# Altium PCB 06002480宁波2号线二期车载PIS系统_功率放大器音频板2 BHC-A-2030-05_PCB V1.0.PcbDoc (part 2 of 6)
Units mil, origin at the board's own origin, x right, y up, seen from the top; angles counter-clockwise.
Board outline 3385.83 x 3779.53 mil, 4 copper layers (Top Layer, GND, VDD, Bottom Layer); 210 components, 185 nets, 792 pads, 313 vias.
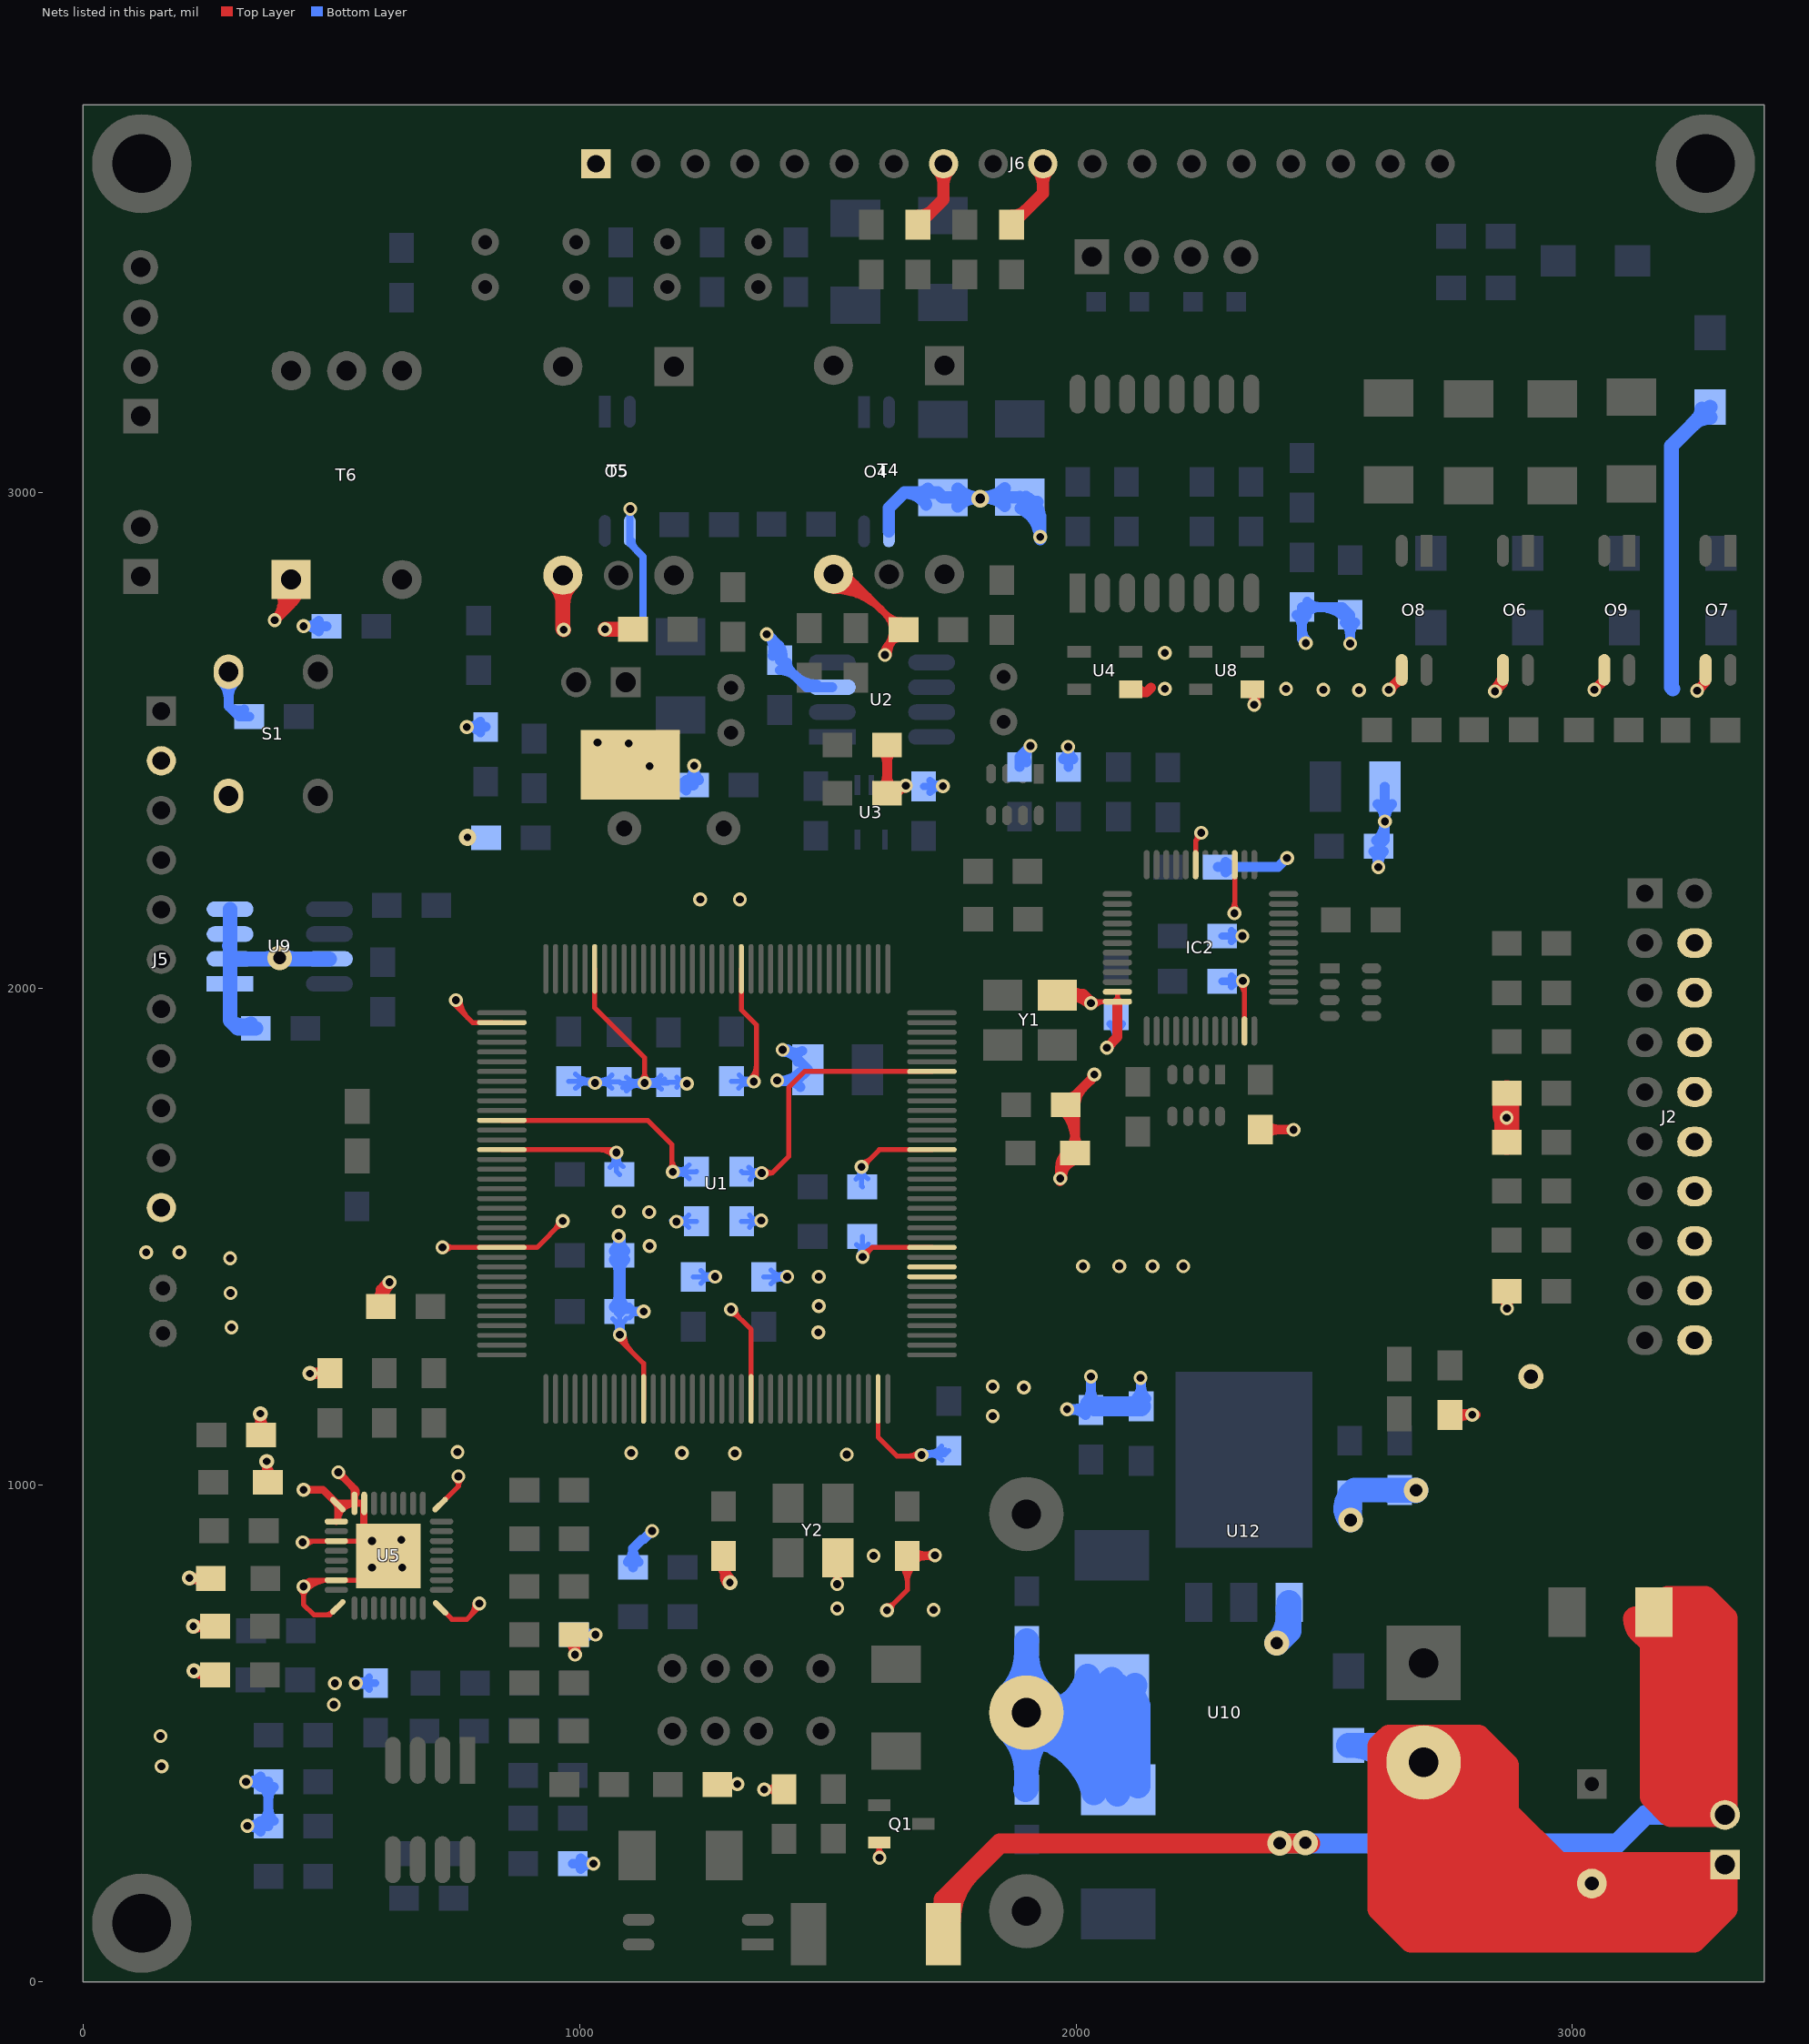
[diagram p4: the nets of this part, all layers, seen from the top]

## Via types
v1: diameter 28, hole 16, Top Layer to Bottom Layer, 240 vias
v2: diameter 30, hole 15, Top Layer to Bottom Layer, 25 vias
v3: diameter 35, hole 15, Top Layer to Bottom Layer, 16 vias
v4: diameter 30, hole 18, Top Layer to Bottom Layer, 10 vias
v5: diameter 40, hole 20, Top Layer to Bottom Layer, 9 vias
v6: diameter 50, hole 25, Top Layer to Bottom Layer, 7 vias
v7: diameter 50, hole 28, Top Layer to Bottom Layer, 5 vias
v8: diameter 36, hole 20, Top Layer to Bottom Layer, 1 vias

## Nets (pads, with @x,y where several pads share a name; then routed paths per layer and width w, separated by ;. In a path a pad name is that pad's centre, name@x,y a point inside that pad or via, vN(x,y) a via of type N, cw(c..) or ccw(c..) an arc to the next point about the centre after c; other vN are vias at no path point) (continued)
AGND1: C1.1 C3.1 C5.2 C7.2 C8.1 C9.2 C11.1 C13.1 C15.2 C16.1 C17.1 C18.1 C20.1 C21.2 C22.1 C23.1 C24.1 C26.1 C27.2 C29.2 C30.2 C31.1 C34.1 C35.2 C36.1 C37.1 C38.2 C39.1 C40.1 C41.1 C42.1 C43.1 C44.1 C45.2 C46.1 C47.1 C48.1 C49.1 C50.1 C51.1 C52.1 C53.1 C56.2 C57.1 C58.1 C62.1 C63.2 C65.2 C66.2 C67.1 C68.2 C69.1 C70.2 C71.2 C72.2 C73.1 C74.2 C77.2 C80.2 C81.1 D10.A D13.A IC2.15 IC2.19 IC2.35 IC2.36 IC2.47 J2.4 J2.6 J2.8 J2.10 J2.12 J2.14 J2.16 J2.18 J2.20 J5.2 J5.11 J6.1 J6.8 J6.10 O4.3 O5.3 O6.3 O7.3 O8.3 O9.3 pad.0 Q1.2 R1.1 R9.2 R24.2 R29.1 R30.1 R31.1 R35.2 R40.2 R42.2 R50.1 R67.2 R76.1 R97.1 R105.1 S1.1 T4.5 T5.5 T6.1 U1.16 U1.31 U1.38 U1.51 U1.61 U1.83 U1.94 U1.107 U1.120 U1.130 U2.3 U3.3 U4.1 U5.1 U5.3 U5.7 U5.31 U5.32 U5.33 U5.34 U5.35 U5.36 U5.37 U8.1 U9.1 U9.2 U9.3 U9.4 U9.7 U10.4 U12.1 Y1.2 Y2.2 | length 26944.8
  Top Layer w10: v1@437.64,789.64 cw(c422.27,774.27) 444,774.27 cw(c465.73,774.27) 450.36,789.64 cw(c496.84,743.16) U5.7@496.84,808.89 ; v1(442,885) 444.63,887.63 U5.3@510,887.63 584.88,887.63 U5.33@614.51,858 U5.33@565.4,808.89 ; v1@443.29,796.71 cw(c472.7,767.3) 472.7,808.89 ; v1@444.89,804.96 ccw(c446.23,818.54) 455.89,808.89 ; v1@448.36,878.64 cw(c470.08,856.92) 470.08,887.63 ; v1@448.36,891.36 ccw(c457.38,900.38) 457.38,887.63 ; v1@452.77,798.02 cw(c464.14,800.64) 455.89,808.89 ; 485.98,739 ccw(c485.98,762.53) U5.37@502.62,745.89 ; U5.37@513,755 497,739 465,739 444,760 v1(444,796) 444,797 455.89,808.89 ; U5.33@573.11,832.6 cw(c545.98,828.31) U5.33@565.4,808.89 ; U5.33@575.64,881.27 ccw(c560.27,865.9) 560.27,887.63 ccw(c560.27,909.36) U5.33@575.64,893.99 ; U5.33@582,843 ccw(c582,885.28) U5.33@611.89,855.38 ; U5.33@582,878.63 cw(c582,849.94) U5.33@602.28,870.23 ; U5.33@591,887.63 ccw(c605.77,887.63) U5.33@595.33,877.19 ; U5.35@719,961 756,998 ; U5.34@720,753 743,730 773,730 798,755 v1(798,762) ; v1(724,1479) U1.61@843.44,1478.98 913.98,1478.98 966,1531 v1(966,1532) ; v1@730.36,1472.64 cw(c745.67,1457.33) 745.67,1478.98 ; v1@730.36,1485.36 ccw(c745.79,1500.79) 745.79,1478.98 ; v1@750,1977 ccw(c776.56,1977) 757.78,1958.22 ; v1@750.03,1011.26 cw(c738.28,998) 756,998 ; v1(751,1977) 751,1965 784.27,1931.73 U1.38@843.44,1931.73 ; v1(756,1018) 756,998 ; v1@760,1977 ccw(c810.7,1977) 774.85,1941.15 ; v1@761.97,1011.26 ccw(c773.72,998) 756,998 ; 777.69,734.69 ccw(c750.37,762) v1@789,762 ; U1.51@843.44,1675.83 1069.17,1675.83 1074,1671 v1(1074,1670) ; 949.93,1514.93 ccw(c932.86,1532) v1@957,1532 ; 952.34,1517.34 cw(c966,1503.69) v1@966,1523 ; U1.31@1030.45,2040 1030.45,1961.55 1131,1861 v1(1131,1810) ; 1038.21,1675.83 cw(c1038.21,1634.21) v1@1067.64,1663.64 ; v1@1080,1303 ccw(c1101.73,1303) 1086.36,1287.64 ; v1(1081,1303) 1081,1293 1128.87,1245.13 U1.83@1128.87,1173.86 ; v1@1090,1303 ccw(c1135.87,1303) 1103.44,1270.56 ; v1@1124.64,1816.36 ccw(c1109.27,1831.73) 1131,1831.73 ccw(c1152.73,1831.73) v1@1137.36,1816.36 ; R50.1@1277.68,397.37 v1@1320.37,397.37 ; R50.1@1294.75,397.37 ccw(c1294.75,421.25) v1@1311.64,404.36 ; R50.1@1297.79,397.37 cw(c1297.79,377.79) v1@1311.64,391.64 ; R50.1@1299.24,386.16 cw(c1320.37,371.85) v1@1320.37,397.37 ; R50.1@1299.24,408.58 ccw(c1320.37,422.89) v1@1320.37,397.37 ; v1@1305,1345 cw(c1305,1323.27) 1320.36,1338.64 cw(c1335.73,1354) v1@1314,1354 ; v1(1305,1354) 1345.41,1313.59 U1.94@1345.41,1173.86 ; v1(1318,398) 1321,398 v1@1320.37,397.37 ; U1.16@1325.72,2040 1325.72,1957.28 1356,1927 1356,1818 v1(1351,1813) ; v1@1344.64,1819.36 ccw(c1317.2,1846.8) 1356,1846.8 ; v1(1372,387) v1@1372.68,387.68 ; v1@1377.87,393.82 ccw(c1384.73,401.77) 1387.44,391.63 ccw(c1389.89,382.51) v1@1380.73,384.81 ; v1@1378.36,380.64 cw(c1395.36,363.64) R97.1@1395.36,387.68 ; v1@1378.36,393.36 ccw(c1392.1,407.1) R97.1@1392.1,387.68 ; R97.1@1395.38,376.02 ccw(c1372.68,359.75) v1@1372.68,387.68 ; R97.1@1395.38,399.33 cw(c1372.68,415.61) v1@1372.68,387.68 ; R97.1@1411.63,387.68 v1@1372.68,387.68 ; Y2.2@1507.55,822.74 cw(c1496.51,802) v1@1520,802 ; v1@1512.64,807.36 ccw(c1494.86,825.14) Y2.2@1520,825.14 ; v1(1519,801) v1@1520,802 ; Y2.2@1520,820.31 ccw(c1538.31,820.31) v1@1525.36,807.36 ; Y2.2@1520,854 v1@1520,802 ; Y2.2@1532.45,822.74 ccw(c1543.49,802) v1@1520,802 ; v1(1568,1641) 1569,1641 1603.83,1675.83 U1.130@1709.58,1675.83 ; v1@1568,1650 ccw(c1568,1674.14) 1585.07,1657.07 ; v1(1570,1460) 1588.98,1478.98 U1.120@1709.58,1478.98 ; v1@1570,1469 ccw(c1570,1490.73) 1585.36,1475.36 ccw(c1600.73,1460) v1@1579,1460 ; v1@1577,1641 cw(c1596.31,1641) 1582.66,1654.66 ; v1@1597.64,256.36 ccw(c1582.98,271.02) Q1.2@1603.71,271.02 ; Q1.2@1598.89,275.78 cw(c1587.27,264.16) 1603.71,264.16 cw(c1620.15,264.16) Q1.2@1608.52,275.78 ; U1.107@1601.32,1173.86 1601.32,1096.68 1639,1059 1687,1059 v1(1689,1061) ; Q1.2@1603.71,272.43 ccw(c1626.43,272.43) v1@1610.36,256.36 ; Q1.2@1603.71,280.6 1603.71,242.71 1604,243 v1(1604,250) ; v1(1619,748) 1660.05,789.05 C36.1@1660.05,857.64 1715.36,857.64 1716,857 v1(1716,859) ; v1@1619,757 ccw(c1619,778.73) 1634.36,763.36 ccw(c1649.73,748) v1@1628,748 ; C36.1@1645.91,838.5 cw(c1611.76,804.35) 1660.05,804.35 cw(c1708.33,804.35) C36.1@1674.19,838.5 ; 1662.44,1059 ccw(c1662.44,1087.56) v1@1682.64,1067.36 ; 1672.1,1059 cw(c1672.1,1044.1) v1@1682.64,1054.64 ; C36.1@1674.19,843.5 cw(c1708.33,809.35) 1708.33,857.64 cw(c1708.33,905.92) C36.1@1674.19,871.78 ; 1689.71,862.63 ccw(c1696.27,887.1) v1@1710.83,866.37 ; 1690.99,857.64 ccw(c1690.99,884.01) v1@1709.64,865.36 ; 1693.28,853.6 cw(c1699.49,830.41) v1@1711.5,851.21 ; 1696.4,854.44 ccw(c1691.37,873.22) v1@1708.21,863.5 ; 1697.56,857.64 cw(c1697.56,840.56) v1@1709.64,852.64 ; 1701.85,859.37 cw(c1699.15,849.27) v1@1708.21,854.5 ; v1(2030,1971) 2033,1974 IC2.36@2083.36,1974 IC2.35@2083.36,1993.68 ; v1@2036.36,1964.64 cw(c2058.97,1942.03) IC2.36@2058.97,1974 ; v1@2036.36,1977.36 ccw(c2044.49,1985.49) 2044.49,1974 ; IC2.19@2240.84,2249.59 2240.84,2297.84 ; v1@2243.59,2310.78 cw(c2232.24,2306.44) 2240.84,2297.84 ; v1(2252,2314) 2251,2313 2251,2308 2240.84,2297.84 ; v1@2312.64,2158.36 ccw(c2295.88,2175.12) 2319.58,2175.12 ; v1(2319,2152) 2320,2153 2320,2155 2319.58,2155.43 IC2.15@2319.58,2249.59 ; 2319.58,2172.34 ccw(c2339.34,2172.34) v1@2325.36,2158.36 ; v1@2329.64,2009.64 cw(c2306.4,1986.4) 2339.26,1986.4 ; v1(2336,2016) 2339.26,2012.74 IC2.47@2339.26,1914.95 ; 2339.26,2002.14 cw(c2349.86,2002.14) v1@2342.36,2009.64 ; 455.89,808.89 U5.7@510,808.89 U5.33@565.4,808.89
  Top Layer w15: v2(214,813) v2@214,812 ; v2@217.75,806.5 cw(c225.16,793.68) C68.2@228.99,807.98 ; v2@219.3,807.7 cw(c229.69,797.31) C68.2@229.69,812 ; v2@219.3,818.3 ccw(c234.52,833.52) C68.2@234.52,812 ; v2@220.72,816.34 ccw(c236.4,824.13) C68.2@231.87,807.21 ; v2(223,626) 225,626 v2@233,618 ; v2@225.79,709.53 cw(c234.75,694.19) 239.35,711.35 cw(c243.95,728.51) v2@228.52,719.71 ; v2@225.79,722.47 ccw(c234.75,737.81) 239.35,720.65 ccw(c243.95,703.49) v2@228.52,712.29 ; v2@227.3,710.7 cw(c240.11,697.89) 240.11,716 cw(c240.11,734.11) v2@227.3,721.3 ; v2@228.3,631.3 ccw(c260.42,663.42) C81.1@260.42,618 ; C68.2@238.7,800.62 ccw(c214,779.5) v2@214,812 ; C68.2@238.7,823.38 cw(c214,844.5) v2@214,812 ; C81.1@245.27,610.33 ccw(c233,604.35) v2@233,618 ; C81.1@245.27,625.67 cw(c233,631.65) v2@233,618 ; C73.1@247.93,704.37 ccw(c222,681.3) v2(222,716) ; C73.1@247.93,727.63 cw(c222,750.7) v2(222,716) ; C68.2@257,812 v2@214,812 ; C81.1@266,618 v2@233,618 ; C73.1@266,716 v2(222,716) ; C69.1@345.99,1113.42 ccw(c316.11,1143.3) 358.36,1143.3 ccw(c400.61,1143.3) C69.1@370.74,1113.42 ; v2@350.8,1139.77 cw(c335.64,1129.43) C69.1@353.37,1124.68 ; v2@351.7,1138.7 cw(c335.61,1122.61) C69.1@358.36,1122.61 ; v2@353.25,1137.5 cw(c342.26,1118.47) C69.1@363.49,1124.16 ; v2(357,1144) 359,1144 358.36,1143.36 C69.1@358.36,1101.05 ; C77.2@360.12,1018.85 ccw(c335.04,1046) v2@372,1046 ; 362.07,1129.45 cw(c375.83,1133.13) v2@363.5,1140.25 ; v2@364.7,1042.7 cw(c347.07,1025.07) C77.2@372,1025.07 ; v2@364.96,1042.44 cw(c357.68,1034.42) 368.15,1031.62 ; v2@366.25,1041.5 cw(c354.78,1021.64) C77.2@376.94,1027.58 ; v2(370,1048) v2@372,1046 ; C77.2@372,1006 v2@372,1046 ; C77.2@383.88,1018.85 cw(c408.96,1046) v2@372,1046 ; v1(444,991) 483,991 U5.36@513,961 ; v1@448.6,986.4 cw(c459.69,975.31) 459.69,991 cw(c459.69,1006.69) v1@448.6,995.6 ; v2(457,1225) v2@457.64,1225.64 ; v2@460.75,1231.5 ccw(c469.03,1245.84) C5.2@473.32,1229.84 ; v2@461.36,1218.9 cw(c470.2,1206.54) C5.2@474.14,1221.22 ; v2@462.3,1219.7 cw(c476.65,1205.35) C5.2@476.65,1225.64 ; v2@462.3,1230.3 ccw(c473.56,1241.56) C5.2@473.56,1225.64 ; v2@463.5,1221.25 cw(c480.51,1211.43) C5.2@475.42,1230.4 ; v2@463.5,1228.75 ccw(c476.86,1236.47) C5.2@472.87,1221.56 ; C5.2@484.06,1213.9 ccw(c457.64,1190.02) v2@457.64,1225.64 ; C5.2@484.06,1237.37 cw(c457.64,1261.26) v2@457.64,1225.64 ; C5.2@497.05,1225.64 v2@457.64,1225.64 ; U5.1@510,927.82 513,930.82 U5.36@513,961 ; U5.36@510.32,962.26 cw(c513.24,959.68) U5.36@513.24,963.57 ; U5.1@513,931.58 cw(c542.42,931.58) U5.36@521.62,952.38 ; v1@514,1019.5 cw(c514,1003.81) 525.1,1014.9 cw(c536.19,1026) v1@520.5,1026 ; v1(514,1026) 546.57,993.43 ; U5.36@521.55,952.31 cw(c546.57,930.14) U5.32@546.57,963.57 ; 540.49,999.51 cw(c522.17,981.2) U5.32@548.07,981.2 ; U5.32@547.82,980.35 ccw(c539.29,986.14) 546.57,993.43 ; U5.33@568.87,903.65 cw(c552.85,887.63) U5.33@575.5,887.63 ; U5.33@584.88,887.63 565.44,907.07 565.44,963.57 U5.32@546.57,963.57 ; C34.1@1279.33,838.8 cw(c1262.42,816.95) 1290.05,816.95 ; C34.1@1285.94,832.28 ccw(c1315.93,840.31) v2@1305.52,811.07 ; 1290.05,817.16 ccw(c1316.16,817.16) v2@1297.7,798.7 ; C34.1@1290.05,853.38 ccw(c1352.38,853.38) v2@1308.3,809.3 ; C34.1@1290.05,857.64 1290.05,816.95 ; v2@1295.5,804 ccw(c1277.39,804) 1290.2,816.8 ccw(c1303,829.61) v2@1303,811.5 ; C34.1@1300.76,838.8 ccw(c1317.68,816.95) 1290.05,816.95 ; v2(1303,804) 1290.05,816.95 ; T4.5@1511.38,2802.66 cw(c1511.38,2665.13) 1608.62,2762.38 ; T4.5@1511.38,2817.66 cw(c1511.38,2716.35) 1583.02,2787.98 ; T4.5@1511.38,2832.66 cw(c1511.38,2767.56) 1557.41,2813.59 ; T4.5@1511.38,2834.53 1536.47,2834.53 1648.05,2722.95 C3.1@1651.05,2722.95 ; v1@1611.3,2677.34 ccw(c1605.09,2686.31) 1616,2686.31 ; v1(1615,2672) 1616,2672 1616,2686.31 ; 1617.48,2753.52 cw(c1586.9,2722.95) C3.1@1630.14,2722.95 ; 1618.46,2752.54 ccw(c1647.64,2781.72) C3.1@1647.64,2740.45 ; R9.2@1619.32,2393.63 1641.63,2393.63 v1(1657,2409) cw(c1645.14,2420.86) R9.2@1634.95,2407.53 ; v1@1621.5,2672 cw(c1669.34,2672) C3.1@1635.51,2705.82 ; 1626.3,2696.61 cw(c1647.64,2675.28) C3.1@1647.64,2705.45 ; C3.1@1630.15,2722.32 cw(c1581.77,2720.55) 1616,2686.32 ; v1@1650.5,2409 cw(c1634.81,2409) 1645.9,2397.9 cw(c1657,2386.81) v1@1657,2402.5 ; C3.1@1652.64,2722.95 1616,2686.31 ; U5.36@513,961 515.57,963.57 U5.32@546.57,963.57 ; U5.32@546.57,963.57 546.57,993.43
  Top Layer w20: T6.1@393.94,2808.69 cw(c347.62,2780.38) v1(386,2742) 419,2775 ; 403.96,2759.96 ccw(c369.92,2794.01) T6.1@411,2819.11 ; T6.1@405.16,2798.1 cw(c392.81,2775) 419,2775 ; T6.1@419,2824 419,2775 ; 421.93,2777.93 ccw(c392.22,2807.64) T6.1@428.07,2829.54 ; T6.1@432.84,2798.1 ccw(c445.19,2775) 419,2775 ; C37.1@589.37,1370.88 ccw(c567.04,1394.64) 599.64,1394.64 ; C37.1@599.64,1357.43 cw(c668.57,1357.43) v1@619.83,1406.17 ; C37.1@599.64,1359.95 599.64,1394.64 ; 599.64,1386.47 cw(c618.2,1386.47) v1@617.21,1405.01 ; 605.05,1400.05 cw(c617,1388.1) v1@617,1405 ; C37.1@609.91,1370.88 cw(c632.24,1394.64) 599.64,1394.64 ; v1(617,1409) 614,1409 599.64,1394.64 ; C65.2@978.07,688.57 cw(c952.46,662.96) 988.68,662.96 cw(c1024.89,662.96) C65.2@999.28,688.57 ; C65.2@988.68,674.26 ccw(c1006.26,674.26) v1@993.83,661.83 ; C65.2@988.68,699.18 988.68,660.68 988,660 989,659 v1(991,659) ; C65.2@992.06,675.6 ccw(c1009.38,670.96) v1@994.35,661.18 ; R9.2@1608.72,2404.24 ccw(c1583.11,2429.84) 1619.32,2429.84 ccw(c1655.54,2429.84) R9.2@1629.93,2404.24 ; R24.2@1608.72,2480.02 cw(c1583.11,2454.42) 1619.32,2454.42 cw(c1655.54,2454.42) R24.2@1629.93,2480.02 ; R9.2@1619.32,2393.63 R24.2@1619.32,2490.63 ; v1@1968,1612.2 cw(c2013.32,1612.2) C7.2@1998.05,1654.88 ; v1(1968,1618) 1968,1639 ; 1968,1640.6 cw(c2003.16,1640.6) C7.2@1991.32,1673.71 ; v1@1972,1618 cw(c2032.36,1618) C7.2@1989.68,1660.68 ; C8.1@1973.75,1755.44 cw(c1915.22,1696.91) 1998,1696.91 ; C7.2@1975.93,1646.93 cw(c1993,1629.86) C7.2@1993,1654 ; C7.2@1978.08,1667.44 cw(c1943.21,1663.8) 1968,1639 ; C8.1@1984.36,1781.05 ccw(c1984.36,1805.19) C8.1@2001.43,1788.12 ; C7.2@1987.39,1679.61 ccw(c1961.79,1705.21) 1998,1705.21 ccw(c2034.21,1705.21) C7.2@2008.61,1679.61 ; C8.1@1999.36,1766.05 cw(c2047.65,1766.05) 2013.5,1800.19 ; 2027.83,1814.51 ccw(c2015.34,1827) v1@2033,1827 ; v1(2037,1827) 2037,1823.69 C8.1@1979.36,1766.05 1998,1747.41 C7.2@1998,1669 1968,1639 ; v1(2062,1881) 2083.36,1902.36 IC2.36@2083.36,1974 ; U4.1@2110,2603 2116,2597 2142,2597 ; U4.1@2122.26,2607.38 ccw(c2142,2620.96) 2142,2597 ; 2151,2606 2142,2597 ; U8.1@2355,2603 2359,2599 v1(2359,2572) ; v1@2359,2579.77 cw(c2384.14,2579.77) U8.1@2366.36,2597.54 ; U8.1@2360.81,2586.54 ccw(c2376.77,2582.26) v1@2362.46,2574 ; C9.2@2370.95,1716.36 2439.64,1716.36 2440,1716 v1(2438,1716) ; C9.2@2381.56,1705.75 cw(c2407.17,1680.15) 2407.17,1716.36 cw(c2407.17,1752.57) C9.2@2381.56,1726.97 ; v1(2630,2602) 2656,2628 O8.3@2656,2642 ; v1@2633.86,2600.96 cw(c2658.09,2594.47) O8.3@2645.55,2616.19 ; v1@2633.9,2601.12 cw(c2655.86,2596.15) 2644.6,2615.65 ; 2642.34,2614.34 cw(c2656,2600.69) O8.3@2656,2620 ; R1.1@2753.37,1141.32 2804.32,1141.32 2805,1142 v1(2798,1142) ; R1.1@2763.98,1130.72 cw(c2789.58,1105.11) 2789.58,1141.32 cw(c2789.58,1177.54) R1.1@2763.98,1151.93 ; 2781.34,1143.53 ccw(c2786.34,1162.2) v1@2796,1145.46 ; v1@2841.42,2602.06 ccw(c2807.78,2642) O6.3@2860,2642 2860,2615 v1(2844,2599) ; v1@2842.96,2602.86 ccw(c2838,2621.41) O6.3@2854.62,2611.81 ; v1@2851.64,2606.64 ccw(c2836.27,2622) O6.3@2858,2622 ; R31.1@2857.07,1380.02 cw(c2831.46,1354.42) 2867.68,1354.42 cw(c2903.89,1354.42) 2878.28,1380.02 ccw(c2903.11,1355.2) v1@2868,1355.2 ; R31.1@2857.15,1379.95 cw(c2831.56,1354) v1@2868,1354 ; R31.1@2857.59,1379.53 cw(c2836.21,1356) v1(2868,1356) ; R31.1@2867.68,1390.63 2867.68,1354.32 v1@2868,1354 ; R31.1@2878.11,1379.85 ccw(c2901.19,1356) v1(2868,1356) ; v1(3044,2602) 3064,2622 O9.3@3064,2642 ; v1@3249.96,2603.86 ccw(c3244.21,2625.32) O7.3@3263.45,2614.22 ; v1@3250.42,2603.96 ccw(c3248.08,2619.99) O7.3@3262.11,2611.89 ; v1(3251,2600) 3268,2617 O7.3@3268,2642 ; 3261.05,2610.05 ccw(c3249.1,2622) O7.3@3266,2622 ; v1@2868,1354 v1(2868,1356)
  Top Layer w25: C26.1@1681.74,3538.36 1733.07,3589.69 J6.8@1733.07,3661.41 ; C26.1@1681.74,3555.86 ccw(c1681.74,3598.11) 1711.61,3568.24 ; J6.8@1721.03,3649.37 cw(c1691.96,3620.3) 1733.07,3620.3 cw(c1774.18,3620.3) J6.8@1745.11,3649.37 ; C23.1@1869.95,3538.36 1933.07,3601.48 J6.10@1933.07,3661.41 ; C23.1@1869.95,3555.86 ccw(c1869.95,3598.11) 1899.83,3568.24 ; J6.10@1921.03,3649.37 cw(c1891.96,3620.3) 1933.07,3620.3 cw(c1974.18,3620.3) J6.10@1945.11,3649.37 ; Y1.2@1962,1987 2014,1987 ; Y1.2@1983.67,1973.94 cw(c2014,1945.25) 2014,1987 ; Y1.2@1983.67,2000.06 ccw(c2014,2028.75) 2014,1987 ; Y1.2@1987.75,1987 cw(c1987.75,1928.75) v1@2028.94,1969.94 ; v1(2030,1971) 2014,1987
  Top Layer w30: T5.5@949.15,2815.3 cw(c907.54,2773.69) 966.38,2773.69 cw(c1025.21,2773.69) T5.5@983.61,2815.3 ; T5.5@966.38,2832.53 966.38,2724.62 v1(968,2723) ; v1(1051.34,2723.95) C13.1@1107.64,2723.95 ; C3.1@1651.05,2722.95 C3.1@1652.64,2722.95
  Top Layer w50: v1@2864,1744 2864,1787 2867.68,1790.68 R29.1@2867.68,1789.63 R30.1@2867.68,1690.77
  Bottom Layer w10: C40.1@977.95,1813.64 1028.36,1813.64 1032,1810 v1@1034.64,1812.64 ; C40.1@992.09,1799.5 cw(c1026.24,1765.35) 1026.24,1813.64 cw(c1026.24,1861.92) C40.1@992.09,1827.78 ; C40.1@1000.49,1813.64 cw(c1000.49,1779.49) v1@1024.64,1803.64 ; 1005.28,1819.25 cw(c997.64,1790.74) v1@1023.21,1805.5 ; 1010.04,1809.3 cw(c1013.42,1796.69) v1@1023.82,1804.57 ; 1015.92,1816.4 ccw(c1019.53,1829.86) v1@1026.5,1817.79 ; v1@1035.5,1817.79 ccw(c1043.62,1831.86) 1047.83,1816.17 ; v1@1037.36,1803.64 cw(c1059.1,1781.9) C42.1@1059.1,1812.64 ; v1@1037.36,1816.36 ccw(c1046.36,1825.36) 1046.36,1812.64 ; v1@1038.28,1804.71 cw(c1046.75,1798.55) 1049.46,1808.67 ; v1@1038.79,1805.5 cw(c1062.36,1791.89) C42.1@1055.32,1818.18 ; C39.1@1061.44,1640.31 ccw(c1032.64,1670) v1(1074,1670) ; C42.1@1065.18,1799.16 ccw(c1034.64,1771.31) v1@1034.64,1812.64 ; C42.1@1065.18,1826.12 cw(c1034.64,1853.97) v1@1034.64,1812.64 ; v1@1066.25,1665.42 cw(c1048.21,1654.75) 1068.46,1649.32 cw(c1088.71,1643.89) v1@1078.42,1662.16 ; C48.1@1066.84,1335.22 cw(c1037.27,1303) v1(1081,1303) 1081,1349.31 C48.1@1080.36,1349.95 v1(1129,1350) ; v1@1067.64,1663.64 cw(c1052.27,1648.27) 1074,1648.27 cw(c1095.73,1648.27) v1@1080.36,1663.64 ; v1@1070.4,1661.75 cw(c1064.45,1648.1) 1078.83,1651.95 cw(c1093.22,1655.81) v1@1081.24,1664.65 ; v1@1073.21,1307.5 ccw(c1054.39,1318.36) 1075.38,1323.99 ccw(c1096.36,1329.61) v1@1085.5,1310.79 ; v1@1074.64,1309.36 ccw(c1059.27,1324.73) 1081,1324.73 ccw(c1102.73,1324.73) v1@1087.36,1309.36 ; v1@1076.5,1310.79 ccw(c1065.73,1329.45) 1086.54,1323.87 ; C39.1@1080.36,1625.95 1074,1632.31 v1(1074,1670) ; v1@1081,1303.21 cw(c1127.1,1303.21) C48.1@1094.5,1335.81 ; 1086.61,1324.13 ccw(c1107.77,1318.46) v1@1088.79,1307.5 ; C42.1@1087.3,1800.86 cw(c1108.17,1781.61) 1108.17,1810 ; C39.1@1087.74,1641.66 cw(c1110.09,1670) v1(1074,1670) ; C42.1@1094.09,1821.78 ccw(c1122.54,1850.22) v1@1122.54,1810 ; C42.1@1094.65,1794.08 cw(c1131,1760.56) v1(1131,1810) ; C48.1@1100.52,1336.91 cw(c1128.95,1312.45) v1(1129,1350) ; C48.1@1100.52,1363 ccw(c1128.95,1387.45) v1(1129,1350) ; 1106.09,1814.41 ccw(c1112.55,1838.53) v1@1126.11,1817.56 ; C48.1@1107.16,1349.95 ccw(c1107.16,1371.84) v1@1122.64,1356.36 ; C48.1@1107.39,1349.95 cw(c1107.39,1328.39) v1@1122.64,1343.64 ; 1114.55,1812.14 cw(c1110.87,1798.38) v1@1123.21,1805.5 ; v1@1120.87,1346.14 ccw(c1106.05,1339.11) 1110.3,1354.95 ccw(c1114.49,1370.58) v1@1123.81,1357.36 ; v1@1120.87,1353.85 cw(c1105.84,1360.97) 1110.15,1344.91 cw(c1114.48,1328.74) v1@1123.92,1342.57 ; v1@1123.21,1814.5 cw(c1104.39,1825.36) 1110.01,1804.38 cw(c1115.63,1783.39) v1@1126.5,1802.21 ; v1@1124.64,1803.64 ccw(c1109.27,1788.27) 1109.27,1810 ccw(c1109.27,1831.73) v1@1124.64,1816.36 ; v1(1129,1350) v1(1129,1350) ; v1@1134.62,1810 cw(c1134.62,1767.31) C41.1@1164.81,1797.5 ; v1@1135.5,1802.21 cw(c1147.96,1780.67) C41.1@1154.4,1804.7 ; v1@1135.5,1817.79 ccw(c1146.36,1836.61) 1151.99,1815.62 ccw(c1157.61,1794.64) v1@1138.79,1805.5 ; v1@1137.36,1803.64 cw(c1152.73,1788.27) 1152.73,1810 cw(c1152.73,1831.73) v1@1137.36,1816.36 ; v1@1138.79,1814.5 ccw(c1154.84,1823.76) 1150.04,1805.87 ; 1153.16,1810 ccw(c1153.16,1834.4) C41.1@1171.45,1818.25 ; C41.1@1163.96,1824.87 cw(c1131,1853.95) v1(1131,1810) ; C41.1@1187.9,1811.64 cw(c1187.9,1780.9) v1@1209.64,1802.64 ; v1(1195,1531) v1@1194.32,1531.68 ; C41.1@1196.33,1801.74 cw(c1213.36,1792.04) v1@1213.36,1811.64 ; C41.1@1196.33,1821.54 ccw(c1213.36,1831.23) v1@1213.36,1811.64 ; v1@1200.14,1538.38 ccw(c1208.15,1549.87) 1211.77,1536.35 ccw(c1214.78,1525.11) v1@1203.63,1528.43 ; C41.1@1200.64,1811.64 ccw(c1200.64,1824.36) v1@1209.64,1815.36 ; v1@1201.36,1524.64 cw(c1218.36,1507.64) R42.2@1218.36,1531.68 ; v1@1201.36,1537.36 ccw(c1215.1,1551.1) R42.2@1215.1,1531.68 ; v1@1201.86,1525.18 cw(c1207.63,1520.29) 1209.58,1527.59 cw(c1211.76,1535.71) v1@1203.66,1533.43 ; v1(1216,1809) v1@1213.36,1811.64 ; R42.2@1219.62,1519.35 ccw(c1194.33,1499.56) v1@1194.33,1531.68 ; R42.2@1219.62,1544 cw(c1194.33,1563.79) v1@1194.33,1531.68 ; C49.1@1229.05,1419.36 v1@1272.36,1419.36 ; R42.2@1235.37,1531.68 v1@1194.32,1531.68 ; C49.1@1244.27,1406.39 cw(c1272.36,1382.46) v1@1272.36,1419.36 ; C49.1@1244.27,1432.33 ccw(c1272.36,1456.26) v1@1272.36,1419.36 ; C49.1@1249.73,1419.36 ccw(c1249.73,1443.27) v1@1266.64,1426.36 ; C49.1@1252.81,1419.36 cw(c1252.81,1399.81) v1@1266.64,1413.64 ; C49.1@1253.16,1414.22 ccw(c1248.42,1431.91) v1@1264.9,1423.92 ; C49.1@1253.18,1414.22 cw(c1258.41,1394.72) v1@1268.5,1412.21 ; v1@1264.94,1416 ccw(c1251.27,1409.22) 1255.22,1423.95 ccw(c1258.54,1436.33) v1@1267.03,1426.74 ; v1(1273,1420) v1@1272.36,1419.36 ; C43.1@1305.95,1813.64 1306.59,1813 v1(1351,1813) ; C43.1@1320.46,1799.88 cw(c1351,1770.92) v1(1351,1813) ; C43.1@1321.1,1826.7 ccw(c1351,1852.48) v1(1351,1813) ; R40.2@1326.37,1531.68 v1@1366.68,1531.68 ; R40.2@1341.08,1531.68 ccw(c1341.08,1557.92) v1@1359.64,1539.36 ; R40.2@1342.3,1519.58 cw(c1366.67,1501.06) v1@1366.67,1531.68 ; R40.2@1342.3,1543.77 ccw(c1366.67,1562.29) v1@1366.67,1531.68 ; v1@1343.01,1808.85 ccw(c1326.42,1800.22) 1331.26,1818.29 ccw(c1336.1,1836.35) v1@1346.16,1820.59 ; v1@1343.21,1817.5 cw(c1324.39,1828.36) 1330.01,1807.38 cw(c1335.63,1786.39) v1@1346.5,1805.21 ; v1@1344.64,1806.64 ccw(c1329.27,1791.27) 1329.27,1813 ccw(c1329.27,1834.73) v1@1344.64,1819.36 ; R40.2@1347.47,1531.68 cw(c1347.47,1514.47) v1@1359.64,1526.64 ; v1@1357.3,1535.31 cw(c1345.88,1538.34) 1348.94,1526.92 cw(c1353.17,1511.12) v1@1361.45,1525.24 ; v1(1366,1533) 1367,1532 v1@1366.68,1531.68 ; C50.1@1371.05,1419.36 v1@1417.36,1419.36 ; C50.1@1385.61,1405.65 cw(c1417.36,1375.74) v1@1417.36,1419.36 ; C50.1@1385.61,1433.07 ccw(c1417.36,1462.98) v1@1417.36,1419.36 ; C50.1@1394.73,1419.36 ccw(c1394.73,1443.27) v1@1411.64,1426.36 ; 1396.08,1413.66 ccw(c1390.06,1436.13) v1@1410.21,1424.5 ; 1396.86,1424.85 ccw(c1402.01,1444.08) v1@1413.02,1427.5 ; 1397.81,1419.36 cw(c1397.81,1399.81) v1@1411.64,1413.64 ; 1398.18,1414.22 cw(c1403.41,1394.72) v1@1413.5,1412.21 ; 1398.64,1424.38 cw(c1393.7,1405.97) v1@1410.21,1415.5 ; v1(1418,1420) v1@1417.36,1419.36 ; C44.1@1556.48,1616.26 ccw(c1535.66,1641) v1(1568,1641) ; C52.1@1557.46,1484.88 cw(c1539.04,1460) v1(1570,1460) ; v1@1561.26,1635.03 cw(c1552.98,1627.69) 1563.67,1624.83 cw(c1574.36,1621.96) v1@1570.85,1632.46 ; v1@1561.64,1634.64 cw(c1546.27,1619.27) 1568,1619.27 cw(c1589.73,1619.27) v1@1574.36,1634.64 ; v1@1563.49,1466.21 ccw(c1556.43,1472.95) 1565.85,1475.47 ccw(c1575.28,1478) v1@1572.53,1468.64 ; v1@1563.64,1466.36 ccw(c1548.27,1481.73) 1570,1481.73 ccw(c1591.73,1481.73) v1@1576.36,1466.36 ; v1@1566.17,1632.19 cw(c1564.68,1624.99) 1571.78,1626.89 cw(c1578.88,1628.79) v1@1573.99,1634.28 ; v1@1567.01,1468.49 ccw(c1563.12,1479.52) 1574.42,1476.5 ccw(c1585.73,1473.47) v1@1576.84,1465.85 ; C52.1@1569.36,1500.95 1570,1500.31 v1(1570,1460) ; C44.1@1569.36,1600.95 1568,1602.31 v1(1568,1641) ; C44.1@1580.5,1617.56 cw(c1596.22,1641) v1(1568,1641) ; C52.1@1582.05,1485.5 ccw(c1603,1460) v1(1570,1460) ; v1@1693.5,1068.79 ccw(c1704.37,1087.61) 1709.99,1066.62 ccw(c1715.61,1045.64) v1@1696.79,1056.5 ; v1@1695.36,1054.64 cw(c1710.73,1039.27) 1710.73,1061 cw(c1710.73,1082.73) v1@1695.36,1067.36 ; 1704.45,1061 cw(c1704.45,1025.14) C51.1@1729.81,1050.5 ; 1712.25,1061 ccw(c1712.25,1094.67) C51.1@1736.69,1071.52 ; C51.1@1729.43,1078.39 cw(c1689,1116.69) v1(1689,1061) 1735.31,1061 C51.1@1743.95,1069.64 ; v1@1034.64,1812.64 C42.1@1079.95,1812.64 1082.59,1810 v1(1131,1810) ; v1(1131,1810) 1177.31,1810 C41.1@1178.95,1811.64 v1@1213.36,1811.64 ; v1@1194.32,1531.68 1186.32,1531.68 1185,1533 1193,1533 v1@1194.32,1531.68
  Bottom Layer w15: v1@552.57,596.05 cw(c560.42,582.46) 564.48,597.61 cw(c568.54,612.77) v1@554.95,604.93 ; v1@552.57,607.31 ccw(c560.42,620.9) 564.48,605.74 ccw(c568.54,590.58) v1@554.95,598.43 ; v1@553.92,597.08 cw(c565.02,585.98) 565.02,601.68 cw(c565.02,617.37) v1@553.92,606.27 ; R76.1@576.53,589.79 ccw(c549.33,564.61) v1(549.32,601.68) ; R76.1@576.53,613.56 cw(c549.33,638.74) v1(549.32,601.68) ; R76.1@589.37,601.68 v1(549.32,601.68) ; v1(1051.34,2723.95) 1052,2723.3 1052,2721 1109,2721 1128,2740 1128,2870 1101,2897 O5.3@1101,2922 1101,2967 v1(1102,2966) ; v1@1055.94,2728.55 ccw(c1074.16,2746.77) 1074.16,2721 ; O5.3@1105.5,2902 ccw(c1128.44,2902) 1112.22,2885.78 ; U3.3@1615.12,2410 v1@1657,2410 ; 1638.89,2410 cw(c1638.89,2390.89) v1@1652.4,2404.4 ; C22.1@1693.05,2407.36 v1@1732.64,2407.36 ; C22.1@1705.99,2395.58 cw(c1732.64,2371.33) v1@1732.64,2407.36 ; C22.1@1705.99,2419.14 ccw(c1732.64,2443.39) v1@1732.64,2407.36 ; C22.1@1714.77,2407.36 ccw(c1714.77,2425.23) v1@1727.4,2412.6 ; C22.1@1715.22,2402.7 ccw(c1710.47,2420.43) v1@1726.37,2411.25 ; C22.1@1715.67,2411.91 ccw(c1720.13,2428.56) v1@1728.75,2413.63 ; C22.1@1717.78,2411.34 cw(c1714.12,2397.68) v1@1726.37,2404.75 ; C22.1@1717.85,2407.36 cw(c1717.85,2393.85) v1@1727.4,2403.4 ; v1(1732,2408) v1@1732.64,2407.36 ; v1(2062,1881) 2080.95,1899.95 ; v1@2062,1887.5 ccw(c2062,1903.19) 2073.1,1892.1 ccw(c2084.19,1881) v1@2068.5,1881 ; C11.1@2068.7,1929.15 cw(c2040.06,1899.95) 2080.95,1899.95 ; C11.1@2080.95,1946.64 2080.95,1899.95 ; C11.1@2093.21,1929.15 ccw(c2121.85,1899.95) 2080.95,1899.95 ; C18.1@2294.36,2014.95 v1@2334.95,2014.95 ; C20.1@2294.36,2105.95 C20.1@2294.36,2105.95 v1(2335,2106) ; C20.1@2313.19,2116.68 ccw(c2335,2133.61) v1(2335,2106) ; C18.1@2313.22,2004.27 cw(c2334.95,1987.51) v1@2334.95,2014.95 ; C18.1@2313.22,2025.64 ccw(c2334.95,2042.39) v1@2334.95,2014.95 ; C20.1@2313.23,2095.28 cw(c2335,2078.54) v1(2335,2106) ; C18.1@2317.78,2014.95 ccw(c2317.78,2034.22) v1@2331.4,2020.6 ; C18.1@2319.99,2010.94 ccw(c2315.71,2026.92) v1@2330.28,2019.08 ; v1@2330.4,2101.4 ccw(c2319.31,2090.31) 2319.31,2106 ccw(c2319.31,2121.69) v1@2330.4,2110.6 ; v1(2336,2016) v1@2334.95,2014.95
  Bottom Layer w20: S1.1@278.86,2618.86 cw(c244.72,2584.72) 293,2584.72 cw(c341.28,2584.72) S1.1@307.14,2618.86 ; S1.1@293,2638 293,2569 ; C21.2@324.25,2562.05 cw(c314.08,2590.08) 293,2569 ; v1(328,403) 328.05,403.05 C67.1@373.32,403.05 R105.1@373.32,313.37 331.37,313.37 331,313 v1(331,314) ; C21.2@334.36,2547.95 314.05,2547.95 293,2569 ; R105.1@357.72,302.76 ccw(c332.11,277.16) 332.11,313.37 ccw(c332.11,349.58) R105.1@357.72,323.98 ; C67.1@357.72,392.44 ccw(c332.11,366.83) 332.11,403.05 ccw(c332.11,439.26) C67.1@357.72,413.65 ; R105.1@362.72,323.98 ccw(c337.11,349.58) 373.32,349.58 ccw(c409.54,349.58) R105.1@383.93,323.98 ; C67.1@362.72,392.44 cw(c337.11,366.83) 373.32,366.83 cw(c409.54,366.83) C67.1@383.93,392.44 ; v1(444,2730) 444.05,2729.95 C80.2@490.36,2729.95 ; C80.2@474.75,2719.35 ccw(c449.15,2693.74) 449.15,2729.95 ccw(c449.15,2766.17) C80.2@474.75,2740.56 ; v1(773,2527) C45.2@811,2527 ; C45.2@800.39,2516.39 ccw(c774.79,2490.79) 774.79,2527 ccw(c774.79,2563.21) C45.2@800.39,2537.61 ; C57.1@986.32,237.95 v1(1028,238) v1(1028,238) ; C66.2@988.64,699.05 1031.95,699.05 v1(1032,699) ; C57.1@1001.93,227.35 cw(c1027.54,201.74) 1027.54,237.95 cw(c1027.54,274.17) C57.1@1001.93,248.56 ; C66.2@1004.25,688.44 cw(c1029.85,662.83) 1029.85,699.05 cw(c1029.85,735.26) C66.2@1004.25,709.65 ; R67.2@1097.07,845.24 ccw(c1071.46,870.84) 1107.68,870.84 ccw(c1143.89,870.84) R67.2@1118.28,845.24 ; R67.2@1107.68,834.63 1107.68,872.68 1126,891 1129,891 v1(1146,908) ; C29.2@1130.03,2419.65 ccw(c1104.43,2445.26) 1140.64,2445.26 ccw(c1176.85,2445.26) C29.2@1151.25,2419.65 ; v1(1141,2448) 1141,2446 1140.64,2445.64 C29.2@1140.64,2409.05 1229.46,2409.05 C27.2@1230.36,2409.95 1230.36,2448.36 v1(1231,2449) ; C29.2@1156.25,2398.44 cw(c1181.85,2372.83) 1181.85,2409.05 cw(c1181.85,2445.26) C29.2@1156.25,2419.65 ; 1186.96,2409.05 ccw(c1186.96,2448.35) C27.2@1214.75,2420.56 ; 1191.33,2409.05 cw(c1191.33,2375.93) C27.2@1214.75,2399.35 ; C27.2@1219.75,2420.56 ccw(c1194.15,2446.17) 1230.36,2446.17 ccw(c1266.57,2446.17) C27.2@1240.97,2420.56 ; v1(1377,2714) v1@1377,2716 ; C24.1@1388.65,2670.56 ccw(c1344.45,2683.44) v1@1377,2716 ; v1(1398,1815) 1399,1814 1437,1814 C38.2@1460,1837 v1@1419,1878 ; v1@1400.1,1814 ccw(c1400.1,1877.21) C38.2@1444.8,1832.51 ; 1400.89,2692.11 cw(c1381.44,2672.66) C24.1@1407.85,2664.96 ; C24.1@1403.05,2641.36 cw(c1403.05,2593.08) 1437.19,2627.22 ; v1@1409,1873 cw(c1409,1836.79) C38.2@1434.61,1862.39 ; v1(1409,1877) v1@1410,1878 ; v1@1411.02,1873.54 cw(c1418.87,1860.08) 1426.66,1873.58 ; 1416.11,1814 cw(c1416.11,1773.42) C38.2@1444.8,1802.11 ; C24.1@1418.05,2656.36 ccw(c1442.19,2656.36) C24.1@1425.12,2639.29 ; 1433.39,2631.02 ccw(c1477.5,2675.14) U2.3@1477.5,2612.75 ; C38.2@1438.76,1853.38 ccw(c1410,1848.89) v1@1410,1878 ; C38.2@1448.42,1874.8 cw(c1435.7,1894.7) v1@1419,1878 ; U2.3@1509,2607 1457.41,2607 C24.1@1403.05,2661.36 1403.05,2689.95 v1@1377,2716 ; U10.4@1854.85,495.24 cw(c1750,386.64) C63.2@1900.95,386.64 1900.95,541.05 U10.4@1900,542 ; U10.4@1868.74,509.63 cw(c1795.49,433.76) 1900.95,433.76 ; C1.1@1886.05,2446.36 1886.05,2467.05 v1(1908,2489) ccw(c1930.67,2466.32) C1.1@1900.27,2456.13 ; C63.2@1887.96,399.14 ccw(c1860.42,415.04) 1891.14,423.27 ; 1889.52,429.3 ccw(c1928.77,439.81) C63.2@1908.45,404.63 ; C63.2@1890.35,402.25 ccw(c1864.74,427.85) 1900.95,427.85 ccw(c1937.17,427.85) C63.2@1911.56,402.25 ; C63.2@1893.45,404.63 ccw(c1873.46,439.25) 1912.08,428.9 ; C63.2@1900.95,387.38 cw(c2054.62,387.38) U10.4@1945.96,496.04 ; 1900.95,435.66 cw(c2006.34,435.66) U10.4@1931.82,510.18 ; 1910.7,423.76 ccw(c1942.04,415.36) C63.2@1913.94,399.14 ; R35.2@1974.45,2462.34 ccw(c1952.9,2485.63) v1@1984.63,2485.63 ; v1(1982,1153) 1983.36,1151.64 C72.2@2029.95,1151.64 ; v1@1984,1156.46 ccw(c1996.26,1177.7) 2002.61,1154.01 ; v1(1984,2487) 1986,2487 v1@1984.63,2485.63 ; R35.2@1984.63,2446.32 v1@1984.63,2485.63 ; R35.2@1994.81,2462.34 cw(c2016.36,2485.63) v1@1984.63,2485.63 ; C72.2@2019.35,1141.03 ccw(c1993.74,1115.43) 1993.74,1151.64 ccw(c1993.74,1187.85) C72.2@2019.35,1162.25 ; C72.2@2019.35,1167.25 ccw(c1993.74,1192.85) 2029.95,1192.85 ccw(c2066.17,1192.85) C72.2@2040.56,1167.25 ; v1(2030,1219) v1(2030,1219) C72.2@2029.95,1151.64 ; C72.2@2037.31,1159 C72.2@2029.95,1151.64 ; C70.2@2120.39,1174.61 ccw(c2094.79,1200.21) 2131,1200.21 ccw(c2167.21,1200.21) C70.2@2141.61,1174.61 ; v1(2130,1216) 2130,1214 2131,1213 C70.2@2131,1159 ; C16.1@2285.36,2244.95 2406.95,2244.95 v1(2425,2263) ; C16.1@2300.97,2234.35 cw(c2326.57,2208.74) 2326.57,2244.95 cw(c2326.57,2281.17) C16.1@2300.97,2255.56 ; C31.1@2444.35,2753.03 cw(c2418.74,2727.43) 2454.95,2727.43 cw(c2491.17,2727.43) C31.1@2465.56,2753.03 ; 2454.95,2725.08 ccw(c2492.08,2725.08) v1@2465.83,2698.83 ; v1(2463,2696) 2454.95,2704.05 C31.1@2454.95,2768.64 2536.36,2768.64 C30.2@2552,2753 v1(2552,2695) ; C31.1@2465.56,2758.03 cw(c2491.17,2732.43) 2491.17,2768.64 cw(c2491.17,2804.85) C31.1@2465.56,2779.25 ; 2490.1,2768.64 cw(c2490.1,2696.1) C30.2@2541.39,2747.39 ; C30.2@2541.39,2737.39 cw(c2515.79,2711.79) 2552,2711.79 cw(c2588.21,2711.79) C30.2@2562.61,2737.39 ; C17.1@2598.75,2276.35 cw(c2573.15,2250.74) 2609.36,2250.74 cw(c2645.57,2250.74) C17.1@2619.97,2276.35 ; C17.1@2604.46,2298.22 ccw(c2570.37,2337) v1(2622,2337) ; v1@2605.54,2247 ccw(c2591.75,2254.96) 2607.13,2259.08 ; C15.2@2607.14,2371.78 cw(c2573.87,2337) v1(2622,2337) ; v1(2609,2245) 2612,2245 2609.36,2247.64 C17.1@2609.36,2286.95 2622,2299.59 v1(2622,2337) ; C15.2@2622,2407 v1(2622,2337) ; C15.2@2636.86,2371.78 ccw(c2670.13,2337) v1(2622,2337) ; v1@1410,1878 v1@1419,1878
  Bottom Layer w25: C48.1@1071.52,1358.79 ccw(c1050.18,1380.13) 1080.36,1380.13 ccw(c1110.54,1380.13) C48.1@1089.2,1358.79 ; C47.1@1071.52,1454.11 cw(c1050.18,1432.78) 1080.36,1432.78 cw(c1110.54,1432.78) C47.1@1089.2,1454.11 ; C47.1@1071.52,1471.79 ccw(c1050.18,1493.13) 1080.36,1493.13 ccw(c1110.54,1493.13) C47.1@1089.2,1471.79 ; v1(1079,1502) 1080.36,1500.64 C47.1@1080.36,1462.95 C48.1@1080.36,1349.95 ; O4.3@1623,2921 1623,2968 1654,2999 ; D10.A@1682.16,2999 ccw(c1682.16,3026.1) D10.A@1701.32,3006.94 ; D10.A@1698.21,2975.37 ccw(c1654,2945.83) 1654,2999 ; D10.A@1761.67,2971.58 cw(c1804.35,2928.9) 1804.35,2989.26 cw(c1804.35,3049.62) D10.A@1761.67,3006.94 ; v8@1811.23,2989.26 ccw(c1811.23,3053.03) D13.A@1856.32,3007.94 ; v8@1816.05,2989.26 cw(c1816.05,2932.32) D13.A@1856.32,2972.58 ; D13.A@1885.5,2989.26 D10.A@1731.5,2989.26 1721.76,2999 1654,2999 ; D13.A@1886.5,2990.26 1928,2948.76 ; D13.A@1888.29,2967.67 cw(c1858.57,2904.92) v1@1928,2904.92 ; D13.A@1899,2965.26 cw(c1899,2935.08) D13.A@1920.33,2956.42 ; D13.A@1899,2990.26 cw(c1877.29,2944.43) 1928,2944.43 ; D13.A@1921.95,2980.36 ccw(c1948.25,2969.01) 1928,2948.76 ; v1(1928,2910) 1928,2948.76
  Bottom Layer w30: 295,2086 296,2086 ; U9.4@296,2160 U9.3@296,2110 296,2086 ; C53.1@338.22,1929.02 cw(c321.98,1961.98) 296,1936 ; C53.1@347.64,1920.05 311.95,1920.05 296,1936 ; 367.03,2060 ccw(c367.03,2090.97) v6@388.93,2069.07 ; v6@403.07,2069.07 ccw(c424.97,2090.97) 424.97,2060 ; U9.7@496,2060 U9.2@296,2060 ; 3202,2604 3199,2607 3199,3093.2 C35.2@3277,3171.2 ; 3242.12,3136.32 cw(c3277,3101.43) C35.2@3277,3150.76 ; C35.2@3251.62,3145.82 ccw(c3230.18,3167.26) C35.2@3260.5,3167.26 ; 296,1936 U9.1@296,2010 U9.2@296,2060 ; U9.2@296,2060 296,2086
  Bottom Layer w40: C72.2@2037.31,1159 C70.2@2131,1159
  Bottom Layer w50: U10.4@1864.64,506.64 cw(c1779.29,421.29) 1900,421.29 cw(c2020.71,421.29) U10.4@1935.36,506.64 ; U10.4@1864.64,577.36 ccw(c1779.29,662.71) 1900,662.71 ccw(c2020.71,662.71) U10.4@1935.36,577.36 ; C63.2@1898,387 1900,389 U10.4@1900,542 ; U10.4@1900,492 cw(c1900,298.86) C62.1@2036.57,435.43 ; C58.1@1900.95,686.64 1900,685.69 U10.4@1900,542 ; U10.4@1938.82,510.49 cw(c2004.99,456.76) 2004.99,542 ; U10.4@1938.82,573.51 ccw(c2004.99,627.24) 2004.99,542 ; U10.4@1946.94,559.22 ccw(c2016,584.56) 2016,511 ; U10.4@1949.53,548.86 ccw(c1993,554.89) 1993,511 2016,511 ; 1959.65,479.84 cw(c1877.62,337.76) C62.1@2036.09,380.22 ; 1993.52,542 ccw(c1993.52,622.25) C56.2@2071.53,603.41 ; 1999.98,472.02 cw(c1914.96,387) C62.1@2035.2,387 ; C56.2@2022.83,603.3 cw(c1958.13,588.87) 2005,542 ; C56.2@2022.93,615.15 cw(c1930,637.6) U10.4@1930,542 ; C62.1@2037.4,397.5 ccw(c1943.59,438.58) 2016,511 ; C62.1@2042.87,405.51 ccw(c1972.53,475.85) 2072,475.85 ; C56.2@2053.49,590.49 cw(c2008.79,545.79) 2072,545.79 cw(c2135.21,545.79) C56.2@2090.51,590.49 ; C62.1@2066.49,405.51 ccw(c2021.79,450.21) 2085,450.21 ccw(c2148.21,450.21) C62.1@2103.51,405.51 ; 2067.78,459.22 cw(c2015.61,407.04) C62.1@2083.2,377.44 ; C56.2@2077.11,590.49 cw(c1961.49,474.87) 2125,474.87 ; 2085,520.15 cw(c2184.47,520.15) C56.2@2114.13,590.49 ; C62.1@2090.11,405.51 ccw(c2005.88,489.75) 2125,489.75 ; C56.2@2093.36,582.92 cw(c2090.36,548.4) 2125,548.4 ; C56.2@2118.8,596.82 ccw(c2149.62,580.62) 2125,556 ; C62.1@2125,394 2125,556 ; U12.1@2426.47,751.78 cw(c2347.2,738.8) v6(2404,682) ; U12.1@2429,742.36 cw(c2343.64,742.36) v6(2404,682) ; U12.1@2429,764 2429,707 v6(2404,682) ; C74.2@2551,975 ccw(c2576.59,953.59) v6(2553,930) 2551,932 C74.2@2551,980 2561.36,990.36 C71.2@2652.05,990.36 ; C71.2@2630.69,990 v6(2685,990) v6@2683.95,988.95 ; U10.4@1900,542 U10.4@1930,542 ; U10.4@1930,542 C62.1@2072,400 ; U10.4@1930,542 2005,542 ; 2005,542 2032,542 2072,502 ; 2005,542 C56.2@2072,609 2072,502 ; 2016,511 2072,455 ; C62.1@2072,400 2072,455 ; C62.1@2072,400 C62.1@2085,387 2085,596 2125,556 ; 2072,455 cw(c2016.96,455) 2047.06,408.92 ccw(c2016.96,455) 2072,455 ; 2072,455 2072,502
  other v1: 158,434 156,495 505,558 507,601 1713,749 1519,752 582,834 643,834 1592,858 582,887.63 641,890 1538,1062 1313,1064 1104,1065 1206,1065 754,1067 1832,1139 1895,1197 1832,1199 1481,1308 299,1318 1482,1361 297,1387 1482,1420 2014,1441 2087,1441 2154,1441 2216,1441 296,1457 127,1469 194,1469 1141,1482 1140,1550 1079,1551 2867,1740 1031,1810 1243,2180 1323,2180 1099,2494 1036,2496 2570,2601 2498,2602 2179,2604 2423,2604 2179,2676
  other v3: 774,2305
  other v6: 396,2062
  other v7: 2916,1219
  other v8: 1807,2987
BOOT0: R40.1 U1.138 | length 729.3
  Top Layer w10: v1@1373.52,1622.79 cw(c1388,1609) 1388,1629 ; v1@1373.52,1635.21 ccw(c1388,1649) 1388,1629 ; U1.138@1709.58,1833.31 1453.31,1833.31 1421,1801 1421,1662 1388,1629 ; v1(1367,1629) 1388,1629 ; v1(1367,1629) 1362,1629 1361,1630 1366,1630 v1(1367,1629)
  Bottom Layer w10: R40.1@1326.37,1631.68 1329.05,1629 v1(1367,1629) ; R40.1@1341,1640.31 ccw(c1367,1664.53) v1(1367,1629) ; R40.1@1343.25,1615.95 cw(c1367,1600.87) v1(1367,1629) ; v1@1358.18,1630.81 cw(c1351.05,1632.27) 1352.93,1625.23 cw(c1354.82,1618.2) v1@1360.27,1623.03 ; v1@1358.71,1625.5 ccw(c1345.53,1619.95) 1349.23,1633.76 ccw(c1352.93,1647.56) v1@1361.56,1636.17 ; v1@1360.64,1622.64 ccw(c1345.27,1607.27) 1345.27,1629 ccw(c1345.27,1650.73) v1@1360.64,1635.36
BOOT1: R42.1 U1.48 | length 676.1
  Top Layer w10: U1.48@843.44,1734.88 1137,1734.88 1186,1685.88 1186,1632 1187,1631 v1(1188,1631) ; v1@1181.64,1637.36 ccw(c1171.1,1647.9) 1186,1647.9 ; 1186,1657.56 ccw(c1214.56,1657.56) v1@1194.36,1637.36
  Bottom Layer w10: v1@1188.72,1631 cw(c1188.72,1585.02) R42.1@1221.23,1617.53 ; v1@1192.5,1623.21 cw(c1203.68,1603.84) 1209.47,1625.44 ; v1@1192.5,1638.79 ccw(c1203.37,1657.61) 1208.99,1636.62 ccw(c1214.61,1615.64) v1@1195.79,1626.5 ; v1@1194.36,1624.64 cw(c1209.73,1609.27) 1209.73,1631 cw(c1209.73,1652.73) v1@1194.36,1637.36 ; v1@1195.79,1635.5 ccw(c1214.06,1646.05) 1208.6,1625.67 ; R42.1@1220.7,1645.27 cw(c1188,1675.6) v1(1188,1631) 1234.69,1631 R42.1@1235.37,1631.68
DC24V_CK1_CPU: U1.118
DC24V_CK2_CPU: U1.117
DC110V: D3.A J4.2 R98.2 | length 5636.8
  Top Layer w40: R98.2@1721.91,134.47 ccw(c1695.57,160.82) 1732.83,160.82 ccw(c1770.09,160.82) R98.2@1743.74,134.47 ; R98.2@1732.83,96 1732.83,164.83 1847,279 v6(2410,279) v6@2472,279 ; R98.2@1748.26,123.56 cw(c1885.15,123.56) 1788.35,220.35
  Top Layer w50: D3.A@3126.76,731.12 ccw(c3166.3,732.05) 3166.3,692.5 ; 3151,692.5 3217.5,692.5 ; 3161,585.07 cw(c3223.43,585.07) 3179.28,629.21 ; D3.A@3164.25,744.5 3191.74,772 3230.5,772 ; 3166.75,620.73 cw(c3192.24,561.24) 3238,607 ; D3.A@3173.1,748.18 cw(c3230.5,690.93) 3230.5,772 ; D3.A@3174.35,739.37 ccw(c3266.5,806.52) 3266.5,692.5 ; D3.A@3176.27,728.58 ccw(c3257.5,705.44) 3197.78,645.72 ; 3176.75,626.89 cw(c3219.76,575.76) 3267,623 ; 3219.5,377.5 ccw(c3307.09,465.09) J4.2@3307.09,341.22 ; 3221.83,623.17 cw(c3330.66,732) D3.A@3176.75,732 ; 3238,399 3238,607 ; 3161,436 3197.78,399.22 ; 3161,436 3161,682.5 ; 3161,436 3161,373 3197.78,336.22 ; 3161,682.5 3197.78,645.72 ; 3161,682.5 3162.5,682.5 ; 3162.5,682.5 3207.5,682.5 ; 3162.5,682.5 3238,607 ; D3.A@3176.75,732 ccw(c3222.02,732) 3190.01,699.99 cw(c3222.02,732) D3.A@3176.75,732 ; 3197.78,336.22 3197.78,399.22 ; 3197.78,336.22 3260.78,336.22 ; 3197.78,399.22 3260.78,336.22 ; 3197.78,399.22 3197.78,645.72 ; 3207.5,682.5 3217.5,692.5 ; 3207.5,682.5 3267,623 ; 3217.5,692.5 cw(c3217.5,733.27) 3176.74,732.3 ccw(c3217.5,733.27) 3217.5,692.5 ; 3217.5,692.5 3266.5,692.5 ; 3217.5,692.5 3230.5,705.5 3230.5,772 ; 3230.5,772 3267,772 3307.09,731.91 3307.09,700 ; 3230.5,772 3302.5,700 3307.09,700 ; 3260.78,336.22 J4.2@3307.09,336.22 ; 3266.5,692.5 3307.09,651.91 ; 3267,623 3267,376.31 J4.2@3307.09,336.22 ; J4.2@3307.09,336.22 3307.09,651.91 ; 3307.09,651.91 3307.09,700 ; 3161,693.99 cw(c3202.27,693.99) 3173.09,723.17 ccw(c3202.27,693.99) 3161,693.99
  Bottom Layer w40: v6(2410,279) 3090,279 3147.22,336.22 J4.2@3307.09,336.22
  other v6: 2462,280
DC110VGND: C59.2 C60.1 J4.1 U10.2 | length 10534.7
  Top Layer w50: 2633.5,160.74 cw(c2981.26,160.74) 2735.36,406.64 ccw(c2878.65,263.35) 2676,263.35 ; 2633.5,281.45 cw(c2860.55,281.45) U10.2@2700,442 ; U10.2@2650,442 cw(c2529.29,442) 2614.64,356.64 cw(c2700,271.29) 2700,392 cw(c2700,288.19) 2773.41,361.59 ; 2676,348.86 cw(c2721.62,348.86) U10.2@2711.3,393.29 ; 2681,273 2700,273 ; U10.2@2704.82,392.23 cw(c2711.92,318.92) 2764,371 ; U10.2@2736.62,407.95 cw(c2801,348.09) 2801,436 ; U10.2@2742.41,468.48 ccw(c2801,505.07) 2801,436 ; U10.2@2748.33,429.18 ccw(c2806.7,413.7) 2764,371 ; U10.2@2749.82,437.74 cw(c2810,432.6) 2810,493 ; U10.2@2750,442 ccw(c2887.61,442) 2790.31,344.69 ; U10.2@2749.99,443.1 ccw(c2792,444.02) 2792,402 ; 2755.54,493 ccw(c2755.54,437.25) U10.2@2700,442 ; 2898.98,145 ccw(c2898.98,338.02) C59.2@3035.46,201.54 ; C59.2@3034.45,195.93 ccw(c2971.78,167.34) 2971.78,236.22 ; C59.2@3042.12,201.9 ccw(c3068.33,234.67) 3098,205 ; C59.2@3042.9,194.87 cw(c3129.22,125.45) 3129.22,236.22 ; 3260.85,212.07 cw(c3307.09,165.83) J4.1@3307.09,231.22 ; 3277,155.21 cw(c3383.06,155.21) J4.1@3310.51,232.57 ; 2612,354 2612,474 2628,490 ; 2612,354 2633.5,375.5 ; 2612,354 2612,147 2675,84 3244,84 3307.09,147.09 J4.1@3307.09,236.22 3129.22,236.22 ; 2628,490 2631,493 U10.2@2751,493 ; 2628,490 2652,490 U10.2@2700,442 ; 2633.5,375.5 cw(c2678.36,330.65) 2690.46,392.92 ccw(c2678.36,330.65) 2633.5,375.5 ; 2633.5,375.5 ccw(c2588.65,420.36) 2650.92,432.46 cw(c2588.65,420.36) 2633.5,375.5 ; 2633.5,375.5 U10.2@2700,442 ; 2633.5,375.5 2633.5,167.5 2675,126 3242,126 3277,161 3277,228.22 3242.78,194 3228,194 ; 2700,273 2710,273 ; 2700,273 2700,295 ; 2700,273 2700,202 2721,181 2938,181 2951,194 ; 2700,295 2710,285 ; 2700,295 2690,305 2700,305 ; 2700,295 2700,305 ; 2700,305 2710,305 ; 2700,305 2700,340 2762,402 2792,402 ; U10.2@2700,442 U10.2@2751,493 ; 2710,273 2716,273 ; 2710,273 2710,285 ; 2710,273 2710,199 2854,199 2854,264 ; 2710,285 2716,279 ; 2710,285 2710,305 ; 2710,305 2729,305 ; 2710,305 2710,317 2764,371 ; 2716,273 2722,273 ; 2716,273 2716,279 ; 2716,273 2716,245 2743,218 2831,218 2831,270 ; 2716,279 2722,273 ; 2716,279 2716,292 2729,305 ; 2722,273 2795,273 ; 2722,273 2758,237 2795,237 2795,273 ; 2729,305 2795,305 ; 2729,305 2769,345 2795,319 2795,305 ; U10.2@2751,493 2810,493 ; U10.2@2751,493 2751,486 2801,436 ; 2764,371 2828,307 ; 2792,402 2828,366 ; 2795,273 2795,305 ; 2795,273 2810,273 2819,264 2825,270 2831,270 ; 2795,305 2818,305 2828,295 ; 2801,436 2867,436 ; 2801,436 2760,436 2676,352 2676,184 2715,145 3084,145 3101,162 3260,162 3228,194 ; 2801,436 2834,403 ; 2810,493 2867,436 ; 2828,295 2828,307 ; 2828,295 2828,290 2831,287 ; 2828,295 2831,292 ; 2828,307 2828,366 ; 2828,307 2831,304 2831,292 ; 2828,366 2828,397 2834,403 ; 2828,366 2854,340 2854,264 ; 2831,270 2837,270 2842.5,275.5 ; 2831,270 2831,287 ; 2831,287 2842.5,275.5 ; 2831,287 2831,292 ; 2831,292 2845,278 2842.5,275.5 ; 2834,403 2867,436 ; 2834,403 2867,370 ; 2842.5,275.5 2854,264 ; 2854,264 2924,194 2951,194 ; 2867,341 2867,370 ; 2867,341 2867,302 2964,205 ; 2867,341 2971.78,236.22 ; 2867,370 2867,436 ; 2951,194 3228,194 ; 2951,194 2962,205 2964,205 ; 2964,205 3098,205 ; 2964,205 2971,198 C59.2@3039,198 3091,198 3098,205 ; 2971.78,236.22 3129.22,236.22 ; 3098,205 3129.22,236.22 ; 3098,205 3217,205 3228,194
  Bottom Layer w50: U10.2@2657.46,415.72 ccw(c2549.01,348.71) C60.1@2549,476.2 2665.8,476.2 U10.2@2700,442